# Altium PCB PCB_1.PcbDoc
Units mil, origin at the board's own origin, x right, y up, seen from the top; angles counter-clockwise.
Board outline 2125 x 2130 mil, 2 copper layers (Top Layer, Bottom Layer); 8 components, 18 nets, 57 pads, 9 vias.
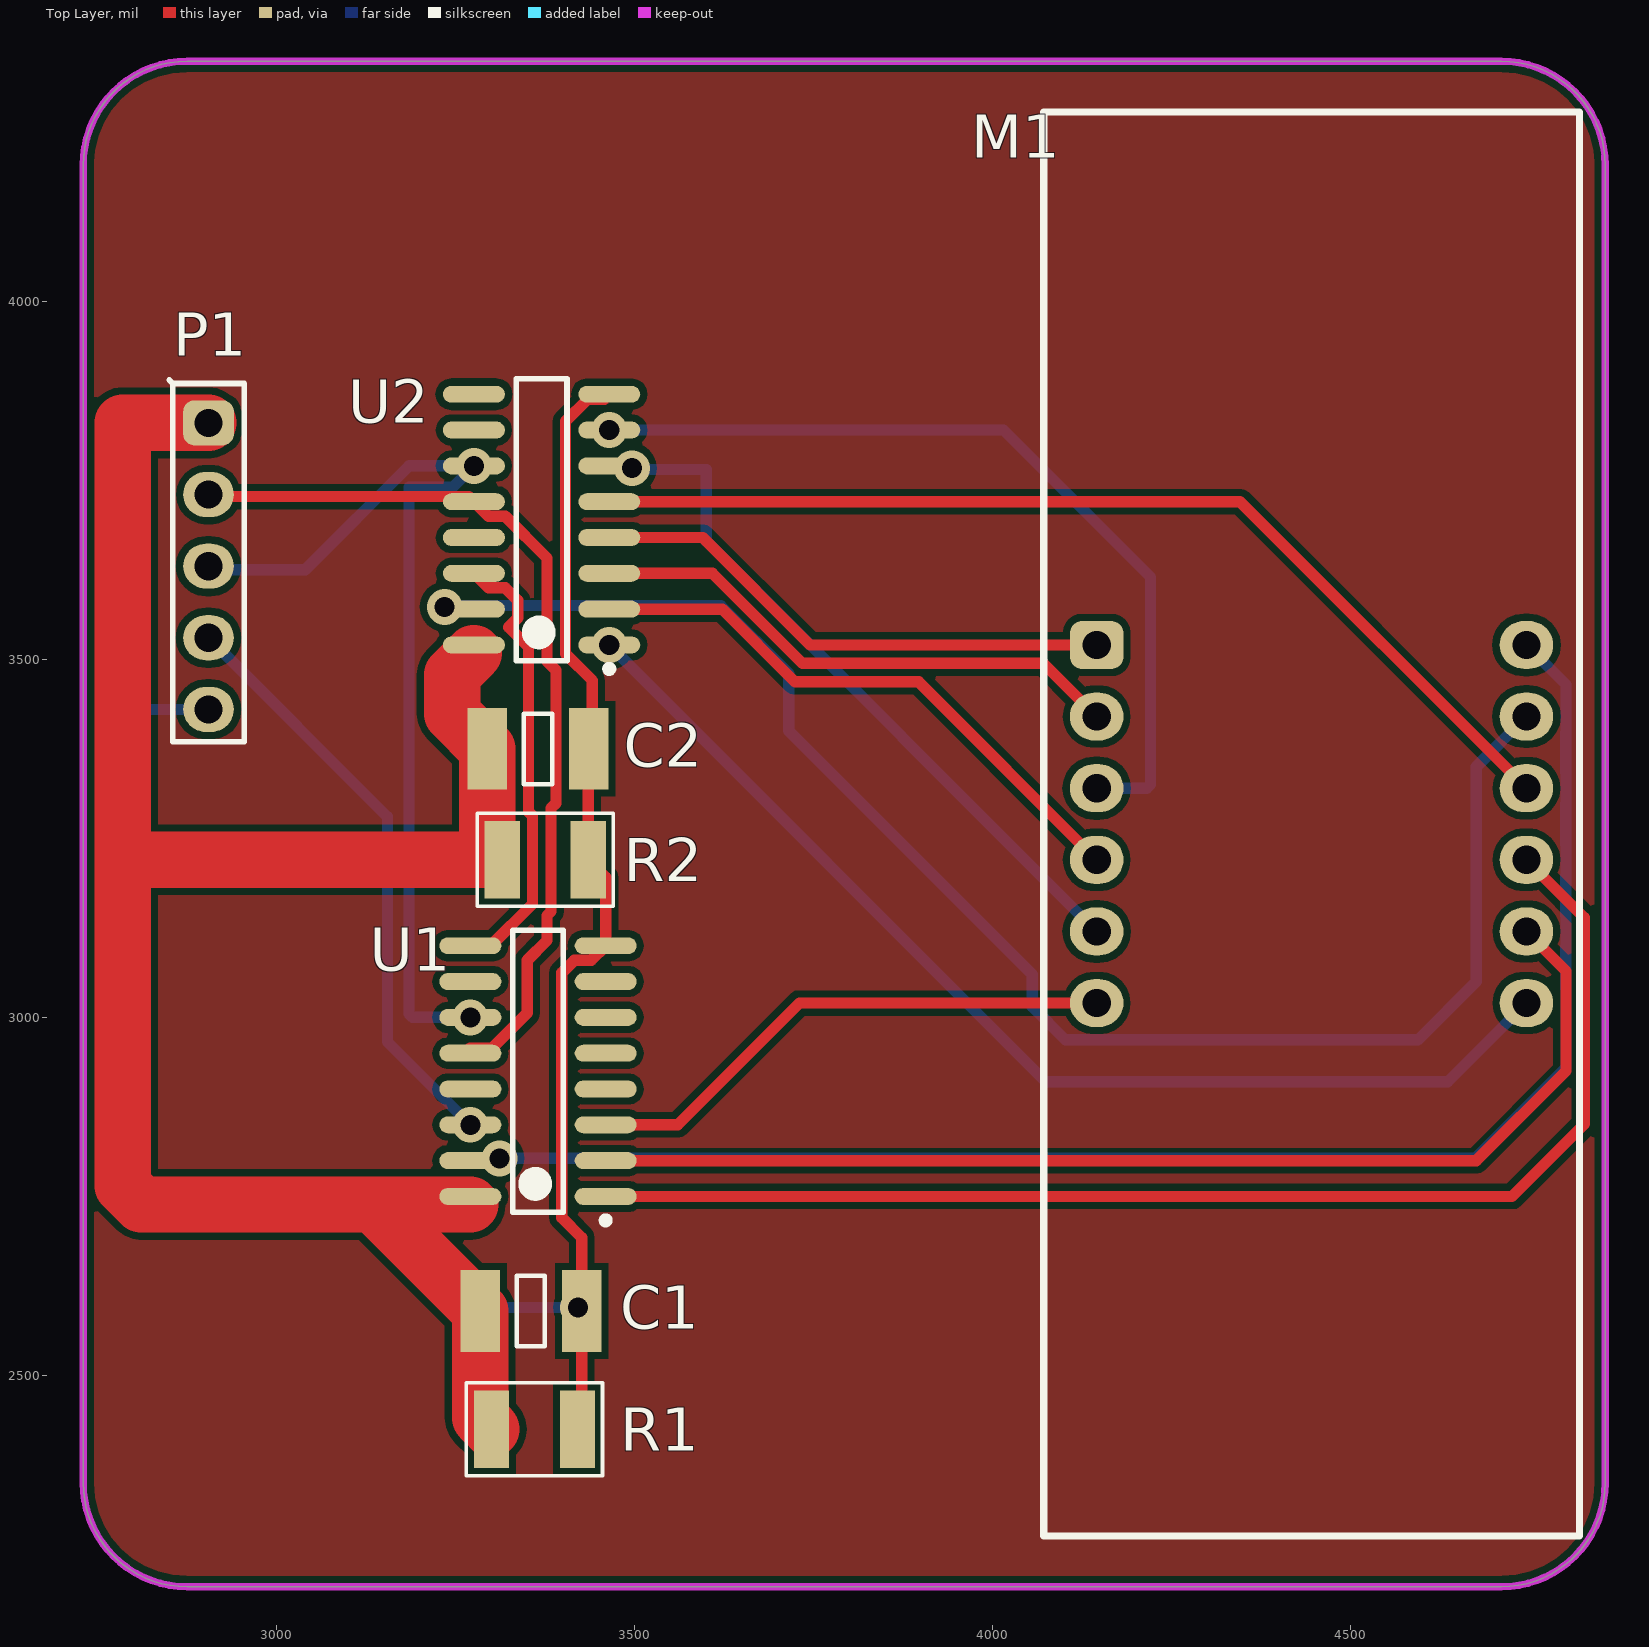
[diagram p0: Top Layer view]
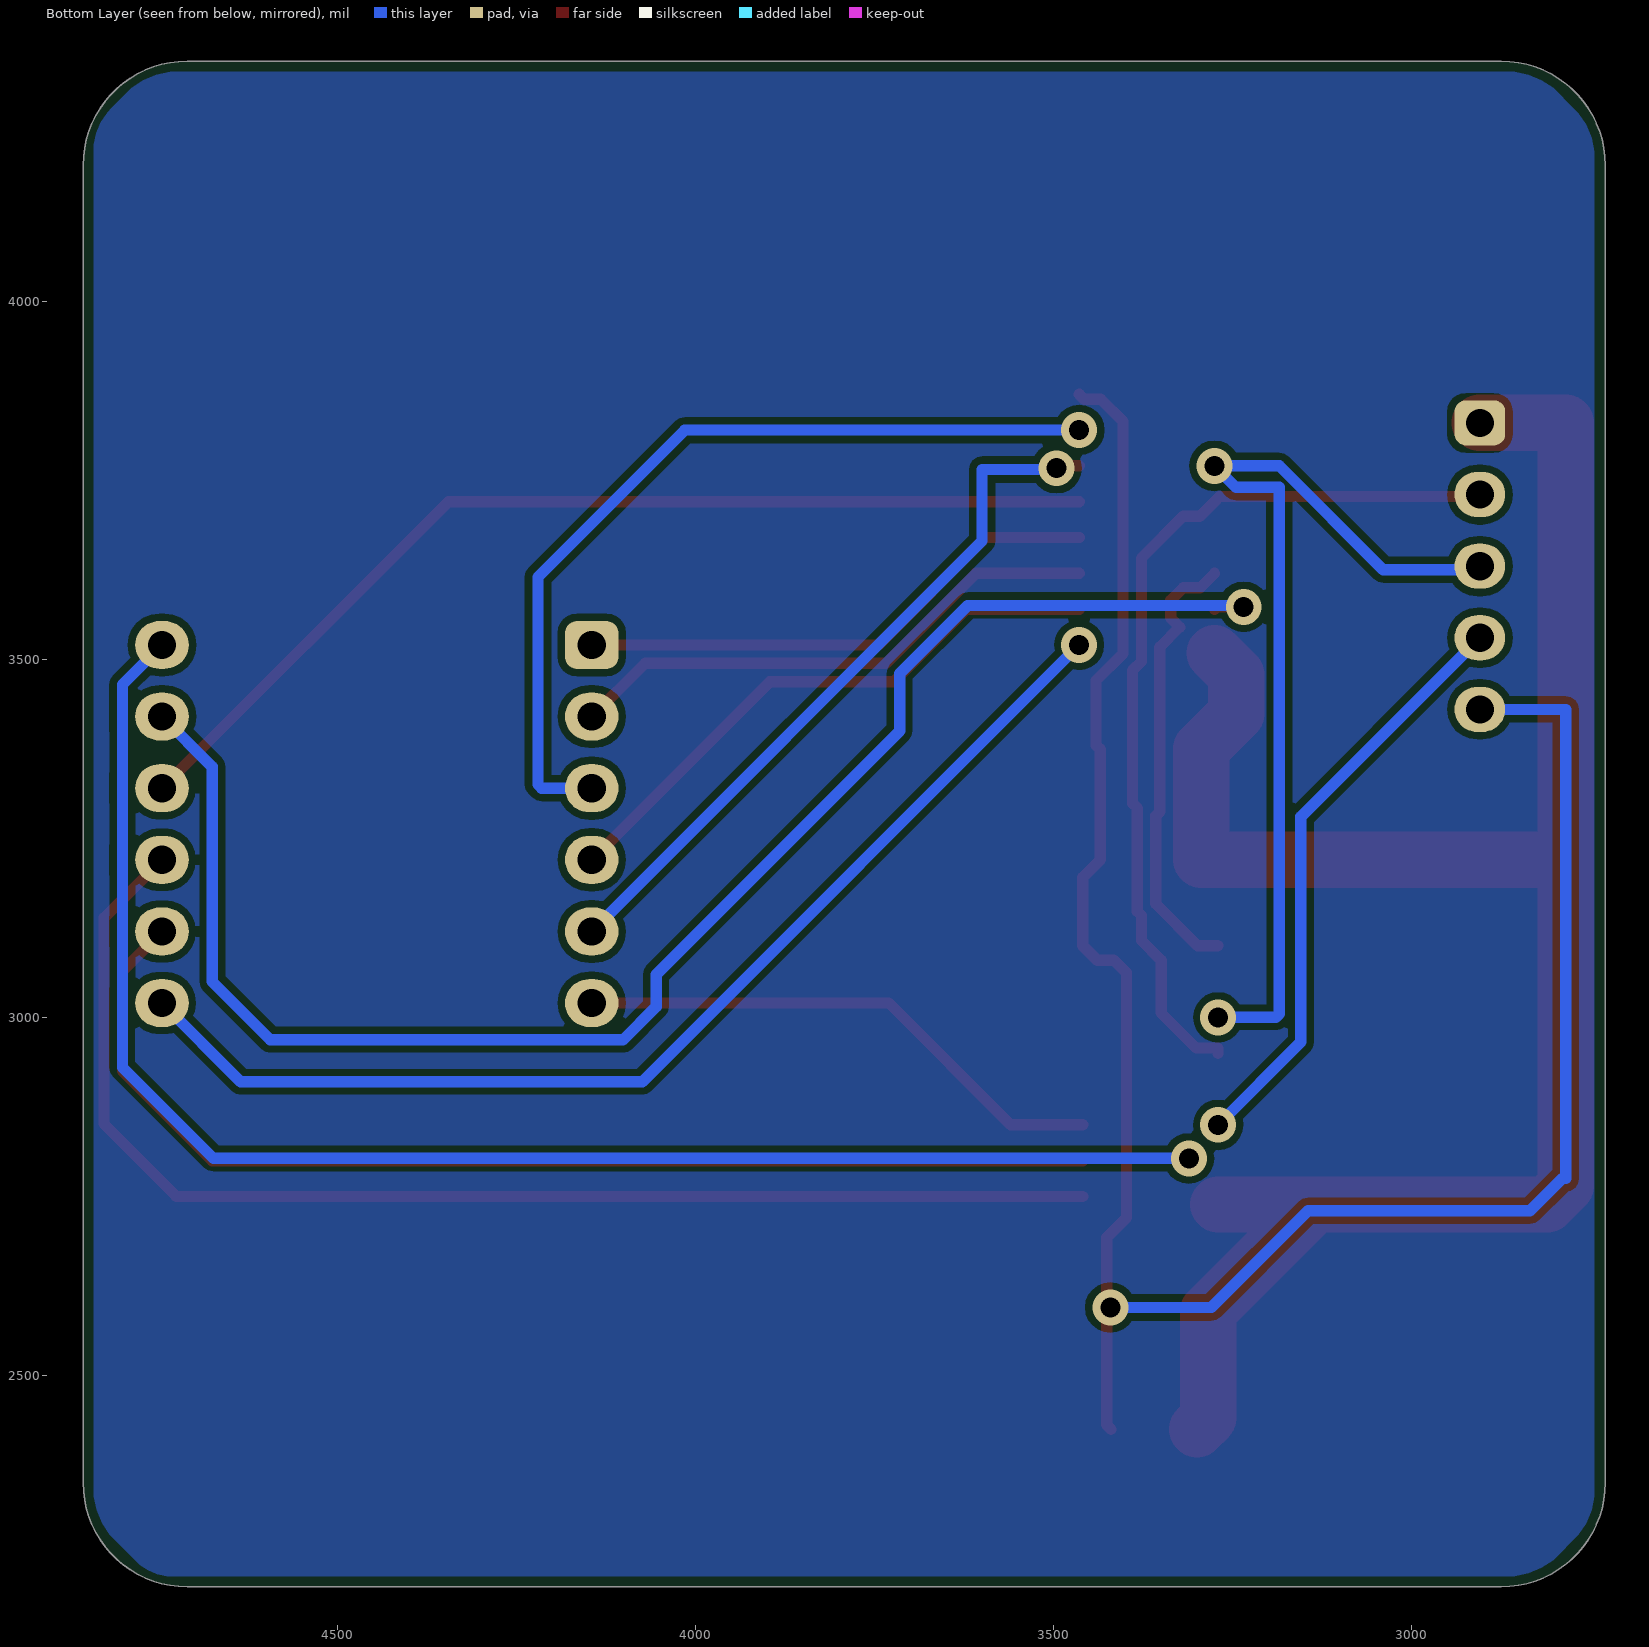
[diagram p1: Bottom Layer view, seen from below]
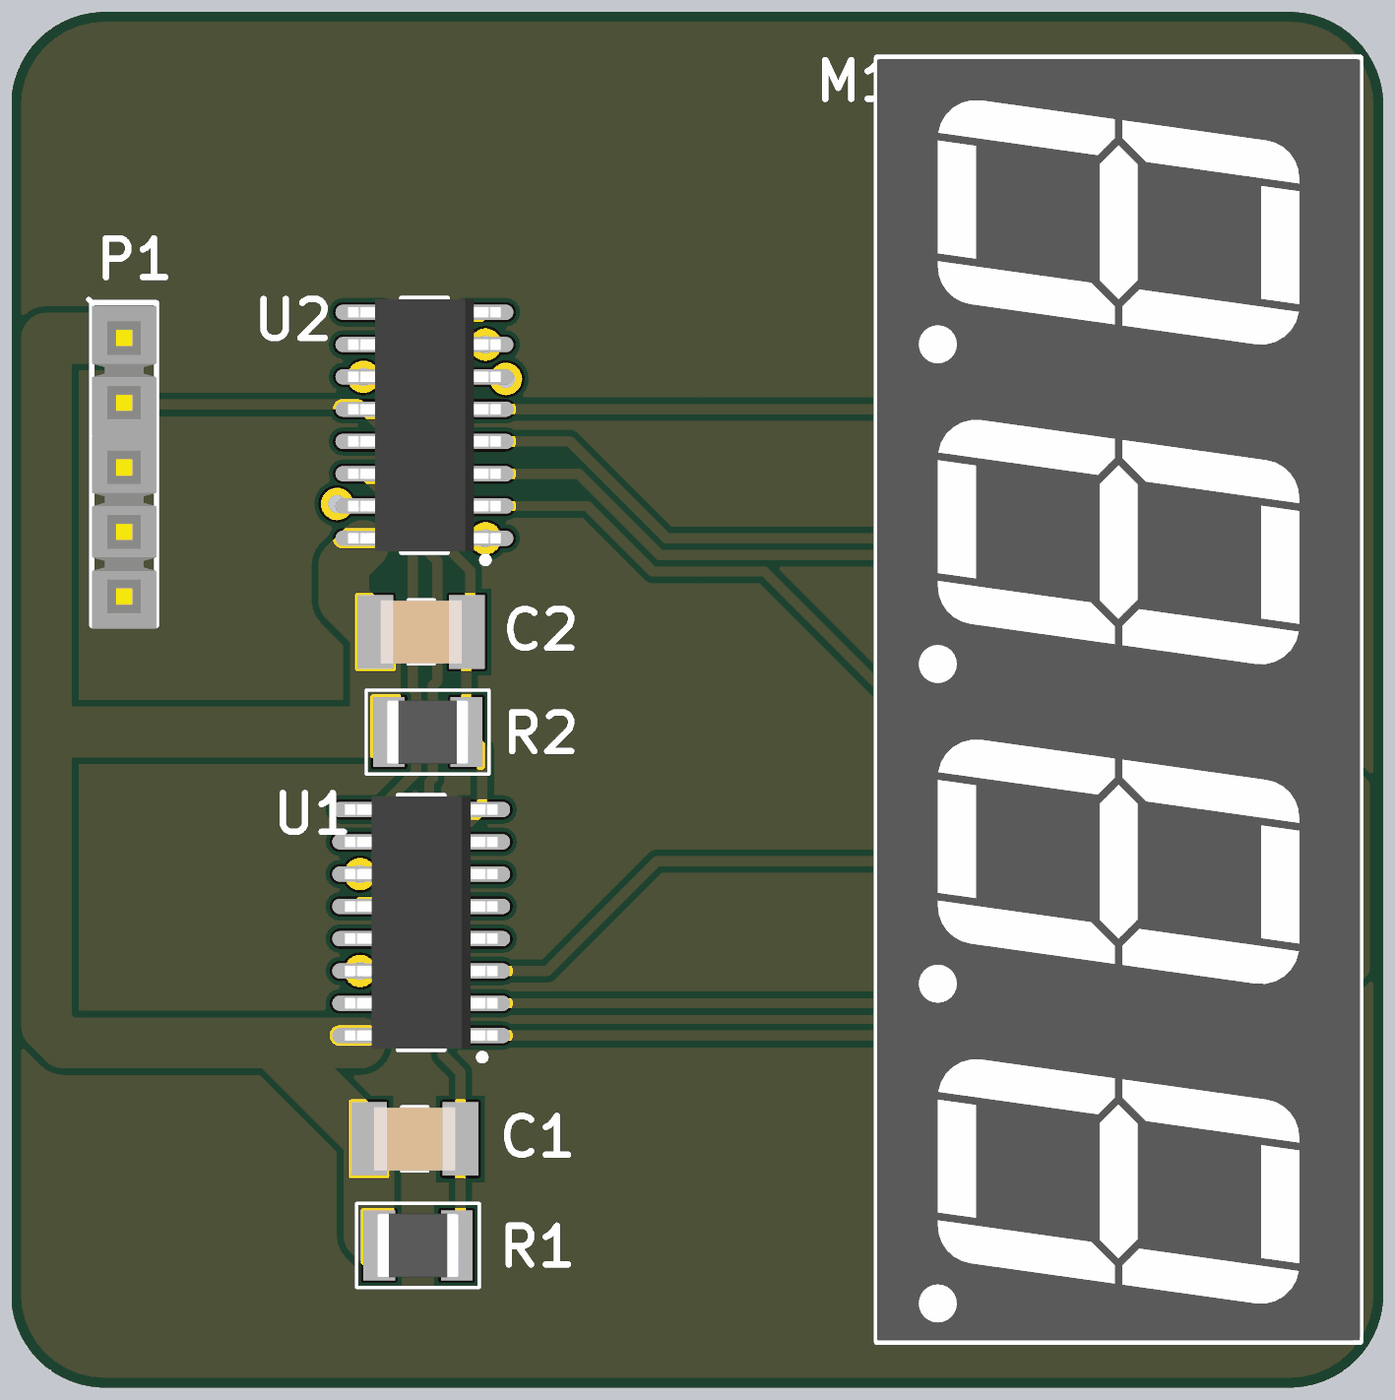
[diagram p2: 3D render of the assembled board from above, using the file's embedded part models]

## Layer stack, top to bottom
Top Solder: solder mask 0.4, Solder Resist, Dk 3.5
Top Layer: signal copper 1.4
Dielectric 1: dielectric 12.6, FR-4, Dk 4.8
Bottom Layer: signal copper 1.4
Bottom Solder: solder mask 0.4, Solder Resist, Dk 3.5

## Board outline
2730,2350 ccw(c2875,2350) 2875,2205 4710,2205 ccw(c4710,2350) 4855,2350 4855,4190 ccw(c4710,4190) 4710,4335 2875,4335 ccw(c2875,4190) 2730,4190

## Design rules (kind name [scope] priority, off if disabled: settings)
Clearance [All] p1: gap=10 ignorepadtopadclearanceinfootprint=FALSE except(0: Arc-Hole Track-Hole SMDPad-Hole THPad-Hole Via-Hole Fill-Hole Poly-Hole Region-Hole Text-Hole)
ComponentClearance [InComponent('H*') OR InComponent('S1')] p1: gap=0 collisioncheckmode=3 verticalgap=0 showdistances=FALSE
Height [All] p1: minheight=0 maxheight=1181.1 prefheight=500
PolygonConnect [All] p1: connectstyle=Relief reliefconductorwidth=10 reliefentries=4 polygonreliefangle="90 Angle" airgapwidth=10
RoutingVias [All] p1: holewidth=28 width=50 viastyle="Through Hole" minholewidth=28 minwidth=50 maxholewidth=28 maxwidth=50
SolderMaskExpansion [All] p1: expansion=4
Width [All] p1: maxlimit=78.74 minlimit=7.87 preferedwidth=15.75 minimp=50.000000 maximp=50.000000 favimp=50.000000
28 further rules are at their usual default settings.

## Components (designator, comment, footprint, x,y, rotation, side; value= is the part's Value field where it differs from the comment)
C1 "100nF" "C 1210" 3355,2590 r0 top
C2 "100nF" "C 1210" 3365,3375 r0 top
M1 "LED 7-SEG QUAD" LED/7SEG/0.56/QUAD 4445,3270 r270 top
P1 "Header 5" HDR/Header/5 2905,3630 r270 top
R1 "1k" "R 1210" 3360,2425 r180 top
R2 "1k" "R 1210" 3375,3220 r180 top
U1 "74HC595" SOIC-16 3365,2925 r180 top
U2 "74HC595" SOIC-16 3370,3695 r180 top

## Footprints (in the part's own frame and the unit in brackets; to place one, negate y for a bottom-side part, rotate by r counter-clockwise, add the part's x,y. Pads: shape width x height; smd on the part's side, far side on the other; paste and mask are expansions set on the pad)
"C 1210" [mm]
  rect 1.4x2.9 smd: 1(-1.8,0) 2(1.8,0)
  silkscreen extent -0.5,-1.25 0.5,1.25, body extent -1.6,-1.25 1.6,1.25, height 0.79
HDR/Header/5 [mm]
  rrect50% 1.6x1.8 hole 1: 1(-5.08,0)
  oval 1.6x1.8 hole 1: 2(-2.54,0) 3(0,0) 4(2.54,0) 5(5.08,0)
  silkscreen extent -6.6,-1.4 6.22,1.27, body extent -6.35,-1.27 6.35,1.27, height 8.89
LED/7SEG/0.56/QUAD [mm]
  rrect50% 1.7x1.9 hole 1: 1(-6.35,-7.62)
  oval 1.7x1.9 hole 1: 2(-3.81,-7.62) 3(-1.27,-7.62) 4(1.27,-7.62) 5(3.81,-7.62) 6(6.35,-7.62) 7(6.35,7.62) 8(3.81,7.62) 9(1.27,7.62) 10(-1.27,7.62) 11(-3.81,7.62) 12(-6.35,7.62)
  silkscreen extent -25.25,-9.5 25.25,9.5, body extent -25.2,-9.5 25.2,9.5, height 8
"R 1210" [mm] "Chip Resistor, 2-Leads, Body 3.2x2.5mm, IPC Medium Density"
  rect 1.25x2.75 smd: 1(-1.525,0) 2(1.525,0)
  silkscreen extent -2.41,-1.65 2.41,1.65, body extent -1.6,-1.25 1.6,1.25, height 0.7
SOIC-16 [mm] "SOIC, 16-Leads, Body 10.0x4.0mm (max), Pitch 1.27mm, IPC Medium Density"
  oval 2.2x0.6 smd: 1(-2.4,4.445) 2(-2.4,3.175) 3(-2.4,1.905) 4(-2.4,0.635) 5(-2.4,-0.635) 6(-2.4,-1.905) 7(-2.4,-3.175) 8(-2.4,-4.445) 9(2.4,-4.445) 10(2.4,-3.175) 11(2.4,-1.905) 12(2.4,-0.635) 13(2.4,0.635) 14(2.4,1.905) 15(2.4,3.175) 16(2.4,4.445)
  silkscreen extent -2.53,-5 0.9,5.42, body extent -3,-4.95 3,4.95, height 1.4

## Part data
C1 C2: library part "Capacitor NP", "Capacitor non-pol"
M1: "LED 7-SEG 0.56 QUAD RED"
P1: "Header, 5-Pin"
R1 R2: library part Resistor, "Resistor"
U1 U2: "8-bit serial-in, serial or parallel-out  shift register with output latches;  3-state"

## Via types
v1: diameter 50, hole 28, Top Layer to Bottom Layer, 9 vias

## Nets (pads, with @x,y where several pads share a name; then routed paths per layer and width w, separated by ;. In a path a pad name is that pad's centre, name@x,y a point inside that pad or via, vN(x,y) a via of type N, cw(c..) or ccw(c..) an arc to the next point about the centre after c; other vN are vias at no path point)
+5: C1.1 C2.1 P1.1 R1.2 R2.2 U1.16 U2.16 | length 2892.4
  Top Layer w78.74: P1.1 2785,3830 2785,3220 ; U1.16@3270.51,2738.82 3140,2738.82 ; U2.16@3275.51,3508.82 3245,3478.31 3245,3424.13 C2.1 3294.13,3220 2785,3220 ; R1.2 3284.13,2440.83 C1.1 3140,2734.13 3140,2738.82 ; 2785,3220 2785,2765 2811.18,2738.82 3140,2738.82
GND: C1.2 C2.2 P1.5 R1.1 R2.1 U1.8 U2.8 | length 3050.5
  Top Layer w15.75: R1.1 3425.87,2430.83 C1.2 3425.87,2692.76 3398.31,2720.32 3398.31,3062.3 3415.7,3079.68 3439.17,3079.68 U1.8 3459.49,3195.55 R2.1 3435.04,3335.63 3435.04,3374.17 C2.2 3440.87,3380 3440.87,3470.15 3403.31,3507.7 3403.31,3832.3 3433.89,3862.87 3457.36,3862.87 U2.8
  Bottom Layer w15.75: P1.5 2785,3430 2785,2775 2790,2775 2835,2730 3145,2730 3280,2595 v1(3420.87,2595)
NetM1_1: M1.1 U2.4 | length 742.6
  Top Layer w15.75: U2.4 3595,3670 3745,3520 M1.1
NetM1_2: M1.2 U2.3 | length 763.4
  Top Layer w15.75: U2.3 3608.59,3620 3734.33,3494.25 4070.75,3494.25 M1.2
NetM1_3: M1.3 U2.7 | length 1207.5
  Bottom Layer w15.75: v1(3464.49,3820) 4015,3820 4220,3615 4220,3325 4215,3320 M1.3
NetM1_4: M1.4 U2.2 | length 825.5
  Top Layer w15.75: U2.2 3622.17,3570 3723.67,3468.5 3896.5,3468.5 M1.4
NetM1_5: M1.5 U2.6 | length 1040.6
  Top Layer w15.75: U2.6 3492.96,3770 v1(3496.15,3766.81)
  Bottom Layer w15.75: v1(3496.15,3766.81) 3481.81,3766.81 3480,3765 3600,3765 3600,3665 M1.5
NetM1_6: M1.6 U1.3 | length 755.9
  Top Layer w15.75: U1.3 3560,2850 3730,3020 M1.6
NetM1_7: M1.7 U2.1 | length 1578.7
  Bottom Layer w15.75: v1(3464.49,3520) 4074.49,2910 4635,2910 M1.7
NetM1_8: M1.8 U1.2 | length 1610.3
  Top Layer w15.75: U1.2 4675,2800 4800.28,2925.28 4800.28,3064.72 M1.8
NetM1_9: M1.9 U1.1 | length 1810.9
  Top Layer w15.75: U1.1 4725,2750 4826.02,2851.02 4826.02,3138.98 M1.9
NetM1_10: M1.10 U2.5 | length 1446.2
  Top Layer w15.75: U2.5 4345,3720 M1.10
NetM1_11: M1.11 U2.15 | length 2243.9
  Top Layer w15.75: v1(3234.71,3573.19) 3272.32,3573.19 U2.15
  Bottom Layer w15.75: v1(3234.71,3573.19) 3232.9,3575 3620,3575 3715,3480 3715,3400 4055,3060 4055,3015 4101.34,2968.66 4593.66,2968.66 4675,3050 4675,3350 M1.11
NetM1_12: M1.12 U1.15 | length 2155.1
  Bottom Layer w15.75: v1(3311.32,2803.19) 4673.19,2803.19 4800.28,2930.28 4800.28,3041.27 4800,3041.54 4800,3098.46 4800.28,3098.73 4800.28,3141.27 4800,3141.54 4800,3198.46 4800.28,3198.73 4800.28,3241.27 4800,3241.54 4800,3298.46 4800.28,3298.73 4800.28,3341.27 4800,3341.54 4800,3398.46 4800.28,3398.73 4800.28,3464.72 M1.12
NetP1_2: P1.2 U1.12 U2.12 | length 1277.5
  Top Layer w15.75: P1.2@2905,3740.32 2918.19,3727.13 3268.39,3727.13 U2.12 3295.83,3699.68 3319.3,3699.68 3377.56,3641.43 3377.56,3497.04 3390,3484.6 3390,3299.01 3383.19,3292.2 3383.19,3147.8 3377.56,3142.17 3377.56,3107.3 3350,3079.74 3350,3006.01 3301.11,2957.13 3270.51,2957.13 U1.12
NetP1_3: P1.3 U1.11 U2.11 | length 1364.4
  Bottom Layer w15.75: P1.3@2905,3645 2925,3625 3040,3625 3185,3770 v1(3275.51,3770) 3245.51,3740 3185,3740 3185,3005 3190,3000 v1(3270.51,3000)
NetP1_4: P1.4 U1.14 | length 831.4
  Bottom Layer w15.75: P1.4 3155,3280 3155,2965.51 v1(3270.51,2850)
NetU1_9: U1.9 U2.14 | length 630.8
  Top Layer w15.75: U1.9 3298.98,3100 3357.44,3158.46 3357.44,3281.54 3351.81,3287.17 3351.81,3517.18 3324.14,3544.85 3324.14,3545.15 3336.69,3557.7 3336.69,3582.3 3319.3,3599.68 3295.83,3599.68 U2.14
pads on no net: U1.4 U1.5 U1.6 U1.7 U1.10 U1.13 U2.9 U2.10 U2.13

## Polygon pours and split planes (outlines as drawn)
no net on Top Layer (solid, pour order 34): 2730,4325 2730,2205 4855,2205 4855,4320 2735,4320
no net on Top Layer "Top Layer-No Net" (solid, pour order 6): 4840,2485
no net on Bottom Layer (solid, pour order 38): 4840,2341.42 cw(c4740,2341.42) 4810.71,2270.71 4780,2240 cw(c4731.72,2288.28) 4731.72,2220 2866.42,2220 cw(c2866.42,2320) 2795.71,2249.29 2774.29,2270.71 cw(c2845,2341.42) 2745,2341.42 2745,4198.58 cw(c2845,4198.58) 2774.29,4269.29 2795.71,4290.71 cw(c2866.42,4220) 2866.42,4320 4723.58,4320 cw(c4723.58,4220) 4794.29,4290.71 4815,4270 cw(c4754.64,4209.64) 4840,4209.64
no net on Bottom Layer "Bottom Layer-No Net" (solid, pour order 28): 4630,2220
no net on Bottom Layer "Bottom Layer-No Net 1" (solid, pour order 26): 4840,2350
no net on Bottom Layer "Bottom Layer-No Net 2" (solid, pour order 24): 4840,2420
no net on Bottom Layer "Bottom Layer-No Net 3" (solid, pour order 22): 2745,4065
no net on Bottom Layer "Bottom Layer-No Net 4" (solid, pour order 20): 2915,4320
no net on Bottom Layer "Bottom Layer-No Net 5" (solid, pour order 18): 2990,4320
no net on Bottom Layer "Bottom Layer-No Net 6" (solid, pour order 16): 4840,2375
no net on Bottom Layer "Bottom Layer-No Net 7" (solid, pour order 14): 4840,2400
no net on Bottom Layer "Bottom Layer-No Net 8" (solid, pour order 12): 2880.29,2220.29
no net on Bottom Layer "Bottom Layer-No Net 9" (solid, pour order 10): 2900,2220

## Keep-outs
Top Layer:
  the board outline again, w10